# Altium PCB E21-015 PS Update.PcbDoc
Units mm, origin at the board's own origin, x right, y up, seen from the top; angles counter-clockwise.
Board outline 119.9 x 74.8 mm, 2 copper layers (Top Layer, Bottom Layer); 63 components, 27 nets, 168 pads, 149 vias.
Unrouted connection lines stored in the file: 4.
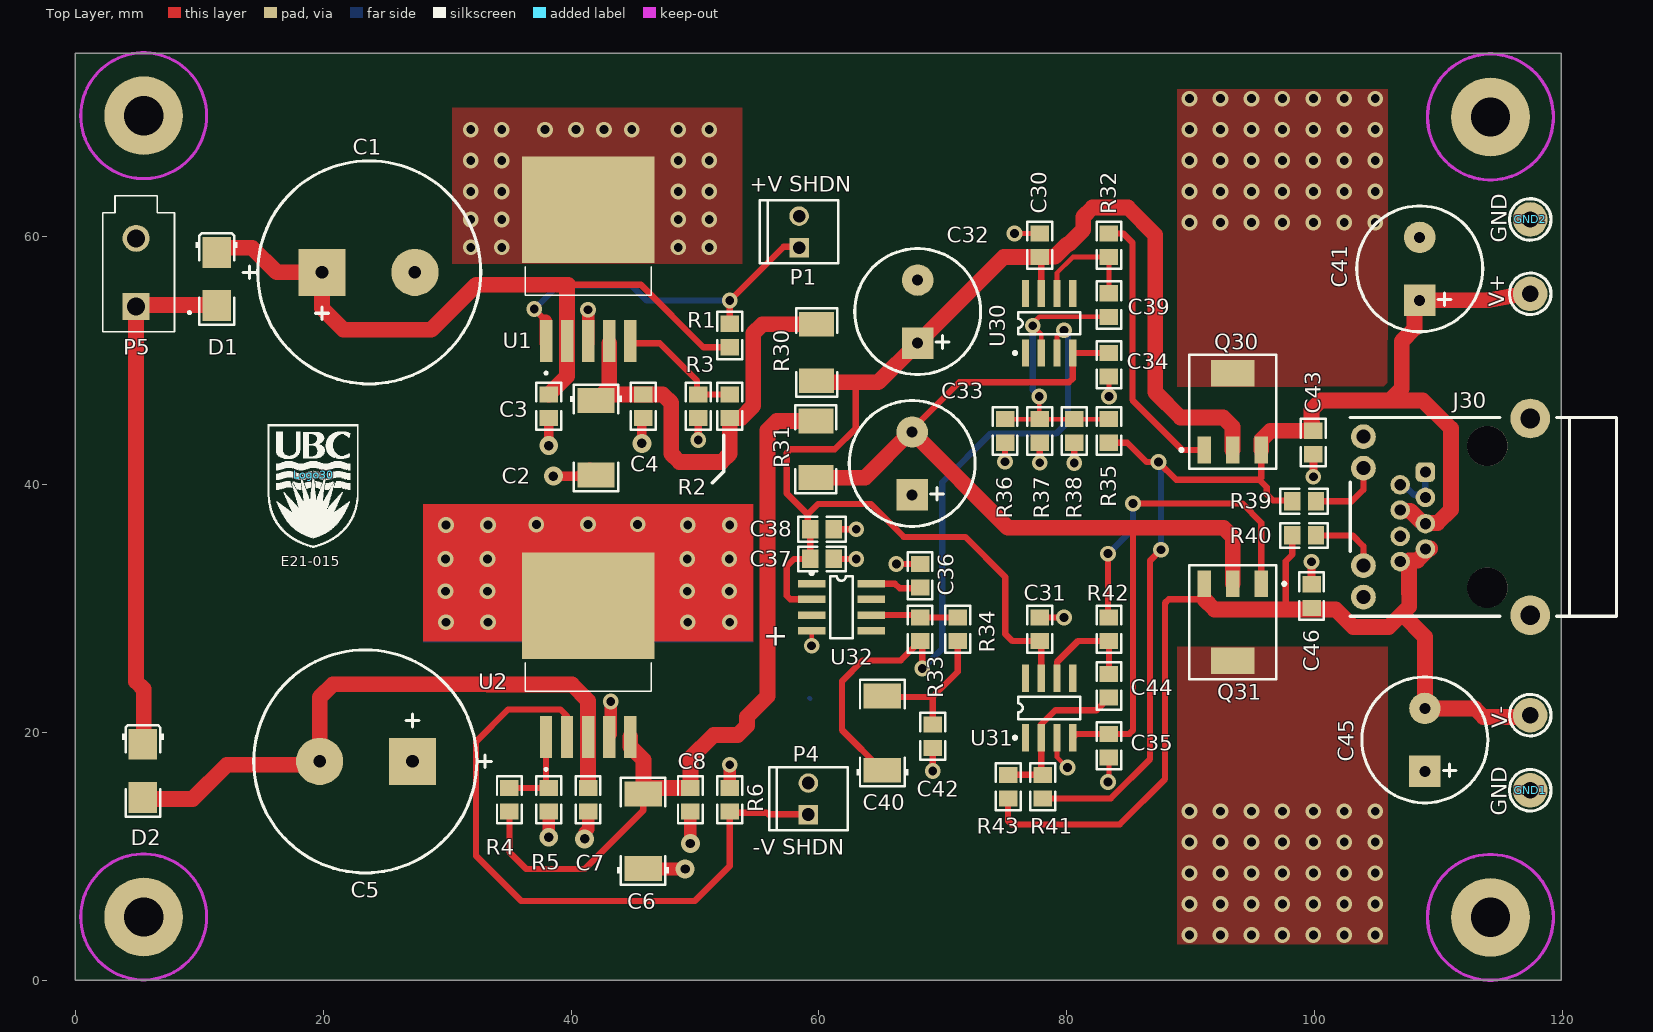
[diagram p0: Top Layer view]
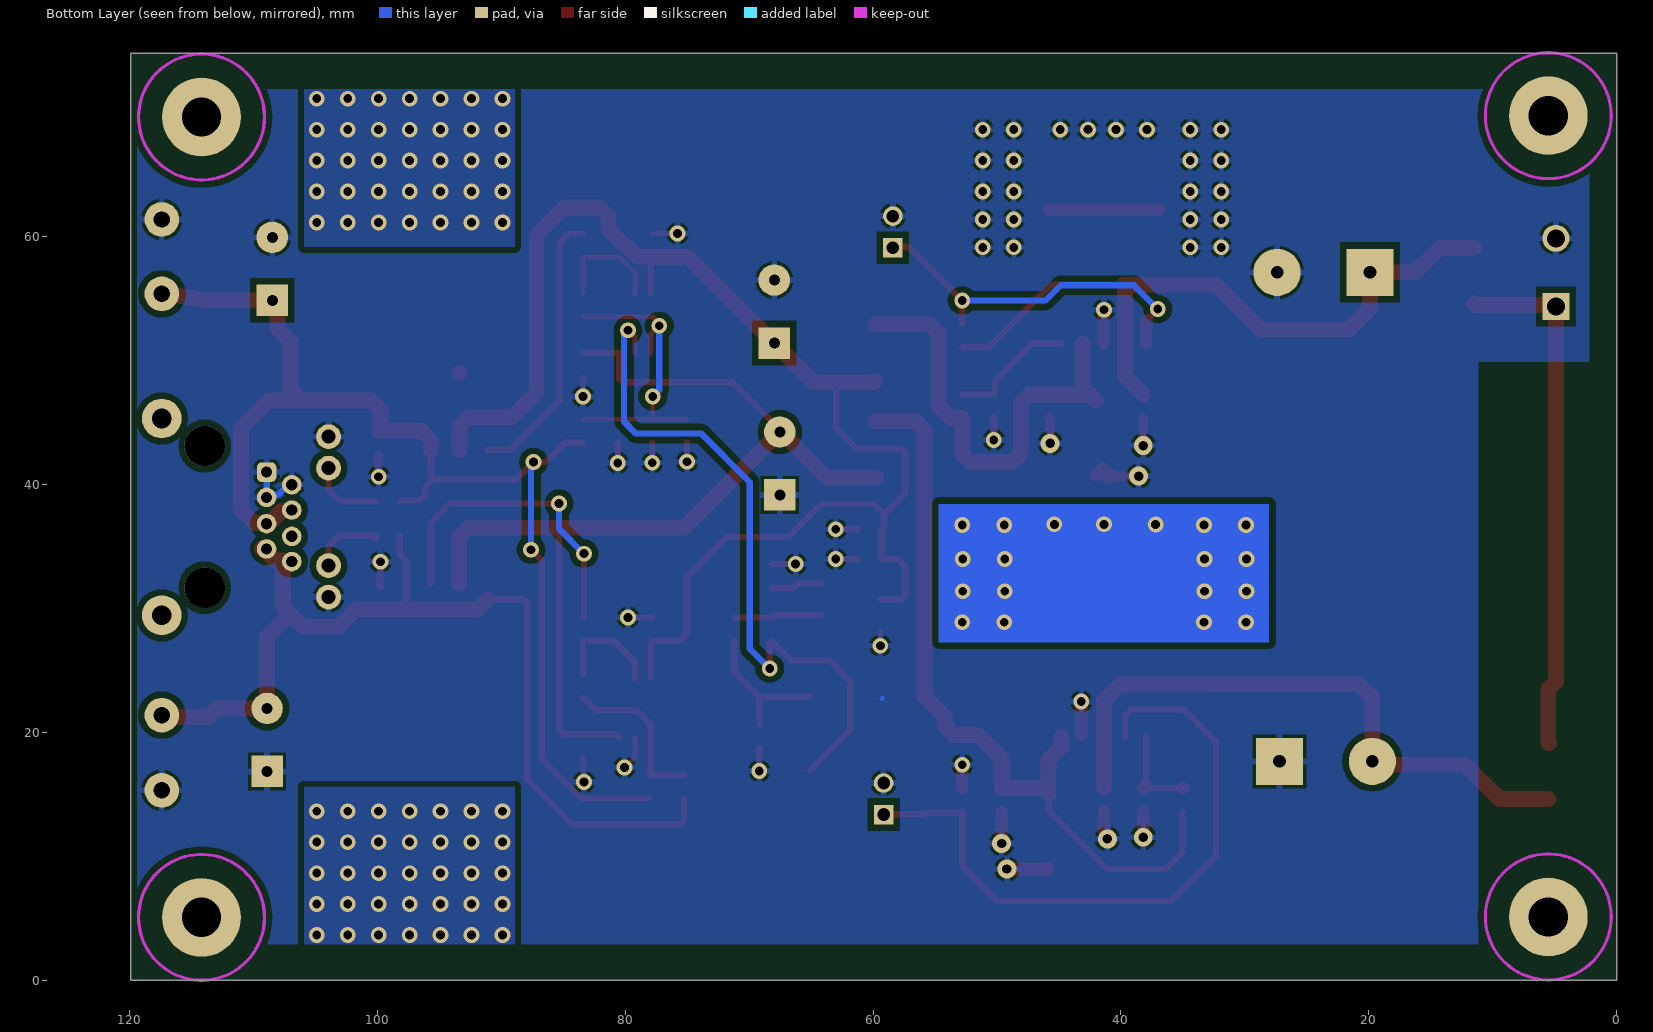
[diagram p1: Bottom Layer view, seen from below]
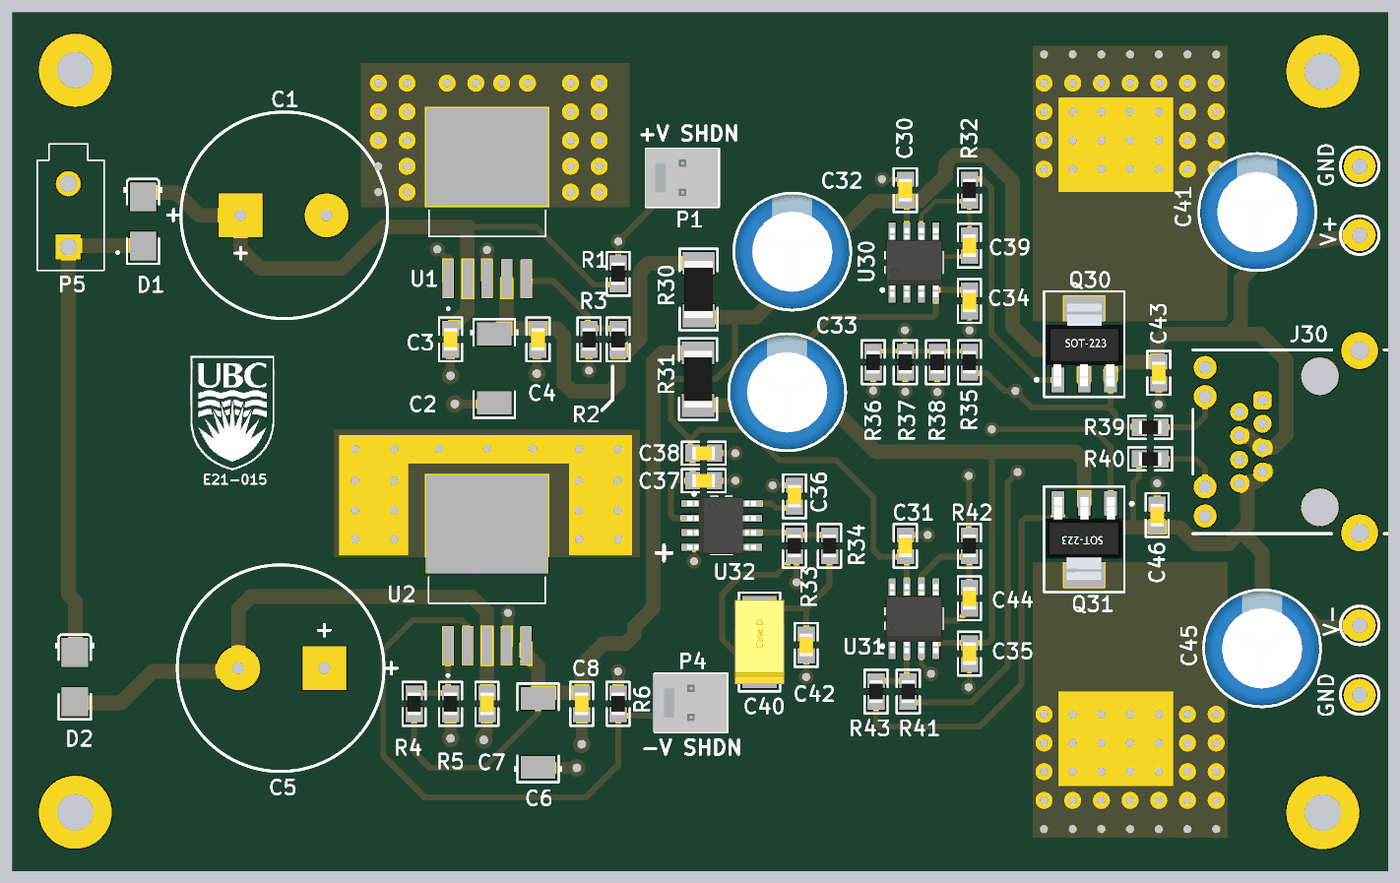
[diagram p2: 3D render of the assembled board from above, using the file's embedded part models]

## Layer stack, top to bottom
Top Solder: solder mask 0.0102, Solder Resist, Dk 3.5
Top Layer: signal copper 0.0356
Dielectric 1: dielectric 0.32, FR-4, Dk 4.8
Bottom Layer: signal copper 0.0356
Bottom Solder: solder mask 0.0102, Solder Resist, Dk 3.5

## Board outline
0,0 0,74.8 119.9,74.8 119.9,0

## Design rules (kind name [scope] priority, off if disabled: settings)
AcuteAngle [All] p1: minimum=3.00000000000000E+0001 checktracksonly=FALSE
Clearance Polygon_Pour [InPolygon] p1: gap=0.508 ignorepadtopadclearanceinfootprint=FALSE except(0: Arc-Hole Track-Hole SMDPad-Hole THPad-Hole Via-Hole Fill-Hole Poly-Hole Region-Hole Text-Hole)
Clearance [All] p2: gap=0.203 ignorepadtopadclearanceinfootprint=FALSE except(0: Arc-Hole Track-Hole SMDPad-Hole THPad-Hole Via-Hole Fill-Hole Poly-Hole Region-Hole Text-Hole)
HoleSize [All] p1: absolutevalues=TRUE maxlimit=6.35 minlimit=0.508 maxpercent=80.000 minpercent=20.000
MinimumAnnularRing [All] p1: minimumring=0.254
MinimumSolderMaskSliver [All] p1: minsoldermaskwidth=0.025
MinimumSolderMaskSliver SilkscreenOverComponentPads [All] p2: minsoldermaskwidth=0.025
PolygonConnect PolygonConnect_9 [All vs IsNamedPolygon('+16V_L01_P003')] p1: connectstyle=Direct reliefconductorwidth=0.254 reliefentries=4 polygonreliefangle="90 Angle" airgapwidth=0.254
PolygonConnect PolygonConnect_8 [All vs IsNamedPolygon('-16V_L01_P004')] p2: connectstyle=Direct reliefconductorwidth=0.254 reliefentries=4 polygonreliefangle="90 Angle" airgapwidth=0.254
PolygonConnect PolygonConnect_7 [All vs IsNamedPolygon('Bottom_GND')] p3: connectstyle=Relief reliefconductorwidth=0.508 reliefentries=4 polygonreliefangle="90 Angle" airgapwidth=0.254
PolygonConnect PolygonConnect_6 [All vs IsNamedPolygon('Bottom_GND')] p4: thpad.connectstyle=Relief thpad.reliefconductorwidth=0.508 thpad.reliefentries=4 thpad.polygonreliefangle="90 Angle" thpad.airgapwidth=0.254 smdpad.connectstyle=Relief smdpad.reliefconductorwidth=0.254 smdpad.reliefentries=4 smdpad.polygonreliefangle="90 Angle" smdpad.airgapwidth=0.254 via.connectstyle=Relief via.reliefconductorwidth=0.254 via.reliefentries=4 via.polygonreliefangle="90 Angle" via.airgapwidth=0.254
PolygonConnect PolygonConnect_5 [All vs IsNamedPolygon('+16V_L02_P006')] p5: connectstyle=Direct reliefconductorwidth=0.254 reliefentries=4 polygonreliefangle="90 Angle" airgapwidth=0.254
PolygonConnect PolygonConnect_4 [All vs IsNamedPolygon('-16V_L02_P002')] p6: connectstyle=Direct reliefconductorwidth=0.254 reliefentries=4 polygonreliefangle="90 Angle" airgapwidth=0.254
PolygonConnect PolygonConnect_3 [All vs IsNamedPolygon('GND_L01_P005')] p7: connectstyle=Direct reliefconductorwidth=0.254 reliefentries=4 polygonreliefangle="90 Angle" airgapwidth=0.254
PolygonConnect PolygonConnect_2 [All vs IsNamedPolygon('-16V_L01_P004')] p8: thpad.connectstyle=Direct thpad.reliefconductorwidth=0.254 thpad.reliefentries=4 thpad.polygonreliefangle="90 Angle" thpad.airgapwidth=0.254 smdpad.connectstyle=Direct smdpad.reliefconductorwidth=0.254 smdpad.reliefentries=4 smdpad.polygonreliefangle="90 Angle" smdpad.airgapwidth=0.254 via.connectstyle=Relief via.reliefconductorwidth=0.254 via.reliefentries=4 via.polygonreliefangle="90 Angle" via.airgapwidth=0.254
PolygonConnect PolygonConnect_1 [All vs IsNamedPolygon('+16V_L01_P003')] p9: thpad.connectstyle=Direct thpad.reliefconductorwidth=0.254 thpad.reliefentries=4 thpad.polygonreliefangle="90 Angle" thpad.airgapwidth=0.254 smdpad.connectstyle=Direct smdpad.reliefconductorwidth=0.254 smdpad.reliefentries=4 smdpad.polygonreliefangle="90 Angle" smdpad.airgapwidth=0.254 via.connectstyle=Relief via.reliefconductorwidth=0.254 via.reliefentries=4 via.polygonreliefangle="90 Angle" via.airgapwidth=0.254
PolygonConnect PolygonViaConnect [(InNet('GND') AND IsVia)] p10: connectstyle=Direct reliefconductorwidth=0.305 reliefentries=4 polygonreliefangle="45 Angle" airgapwidth=0.254
PolygonConnect [All] p11: connectstyle=Relief reliefconductorwidth=0.381 reliefentries=4 polygonreliefangle="45 Angle" airgapwidth=0.254
RoomDefinition "E21-015 PS Update" [InComponentClass('E21-015 PS Update')] p1: confinementstyle=ConfineIn formatcopy=TRUE lockcomponents=FALSE outline -25.5,-25.5 382.907,-25.5 382.907,213.539 -25.5,213.539
RoutingVias [All] p1: holewidth=0.711 width=1.27 viastyle="Through Hole" minholewidth=0.711 minwidth=1.27 maxholewidth=0.711 maxwidth=1.27
SilkToSilkClearance [All] p1: silktosilkclearance=0.051
SilkToSolderMaskClearance [IsPad] p1: minsilkscreentomaskgap=0.051 clearancetoexposedcopper=TRUE
SolderMaskExpansion [All] p1: expansion=0.102 istentingtop=FALSE
Width [All] p1: maxlimit=2.54 minlimit=0.203 preferedwidth=0.635 minimp=50.000000 maximp=50.000000 favimp=50.000000
26 further rules are at their usual default settings.

## Components (designator, comment, footprint, x,y, rotation, side; value= is the part's Value field where it differs from the comment)
C1 "Cap Elec 3300u 35V LESR" C-RAD7.5mm-18mm 19.9,57.131 r180 top value=3300uF
C2 "Cap Tant 10uF 35V D-Size" CC7343 42.007,43.78 r270 top value=10u
C3 "Cap Misc" C2012-0805 38.197,46.32 r90 top value=1u
C4 "Cap Misc" C2012-0805 45.817,46.32 r90 top value=u1
C5 "Cap Elec 3300u 35V LESR" C-RAD7.5mm-18mm 27.204,17.669 r0 top value=3300uF
C6 "Cap Tant 10uF 35V D-Size" CC7343 45.817,12.03 r90 top value=10u
C7 "Cap Misc" C2012-0805 41.372,14.57 r90 top value=1u
C8 "Cap Misc" C2012-0805 49.627,14.57 r90 top value=u1
C30 "Cap Misc" C2012-0805 77.815,59.318 r270 top value=u1
C31 "Cap Misc" C2012-0805 77.815,28.33 r270 top value=u1
C32 "Cap Elec 220u 35V" C-RAD400mil 67.97,53.969 r270 top value=220u
C33 "Cap Elec 220u 35V" C-RAD400mil 67.526,41.708 r270 top value=220u
C34 "Cap Misc" C2012-0805 83.403,49.666 r90 top value=u1
C35 "Cap Misc" C2012-0805 83.403,18.932 r90 top value=u1
C36 "Cap Misc" C2012-0805 68.163,32.648 r270 top value=u1
C37 "Cap Misc" C2012-0805 60.248,34.006 r180 top value=1u
C38 "Cap Misc" C2012-0805 60.248,36.4 r180 top value=u1
C39 "Cap Misc" C2012-0805 83.403,54.492 r90 top value=u1
C40 "Cap Tant 100uF 10V" CC7343 65.115,19.948 r90 top value=100u
C41 "Cap Elec 220u 35V" C-RAD400mil 108.484,57.413 r270 top value=220u
C42 "Cap Misc" C2012-0805 69.179,19.694 r90 top value=1u
C43 "Cap Misc" C2012-0805 99.9,43.4 r90 top value=1u
C44 "Cap Misc" C2012-0805 83.403,23.758 r90 top value=u1
C45 "Cap Elec 220u 35V" C-RAD400mil 108.9,19.4 r270 top value=220u
C46 "Cap Misc" C2012-0805 99.757,31.008 r270 top value=1u
D1 "1N5819" DO-214AA 11.4,56.6 r90 top
D2 "1N5819" DO-214AA 5.45,16.9 r90 top
GND1 "Check Point" PAD-110-52 117.4,15.336 r90 top
GND2 "Check Point" PAD-110-52 117.4,61.4 r0 top
J30 "RJ45_RJE58_Amphenol" RJ45_RJE51_LEDs 117.4,37.4 r90 top
Logo30 "Use UBC Logo" "UBC Logo" 19.231,40.78 r0 top
P1 "HEADER 1X2 L" HDR1X2_LOCKING 58.4,60.4 r90 top
P4 "HEADER 1X2 L" HDR1X2_LOCKING 59.15,14.65 r90 top
P5 "0039296028" MOLEX_0039296028 4.896,57.131 r180 top
Q30 "ZX5T853G" SOT-223 93.4,45.9 r0 top
Q31 "ZX5T951G" SOT-223 93.4,28.9 r180 top
R1 "Res-0805" R0805 52.802,52.035 r270 top value=10k
R2 "Res-0805" R0805 52.802,46.32 r270 top value=13k
R3 "Res-0805" R0805 50.262,46.32 r90 top value=1k
R4 "Res-0805" R0805 35.022,14.57 r270 top value=13k
R5 "Res-0805" R0805 38.197,14.57 r90 top value=1k
R6 "Res-0805" R0805 52.802,14.57 r90 top value=10k
R30 "Res-2010" R2010 59.81,50.667 r270 top value=1R
R31 "Res-2010" R2010 59.76,42.852 r270 top value=1R
R32 "Res-0805" R0805 83.403,59.318 r90 top value=4r7
R33 "Res-0805" R0805 68.163,28.33 r270 top value=1k
R34 "Res-0805" R0805 71.211,28.33 r270 top value=100k
R35 "Res-0805" R0805 83.403,44.332 r270 top value=10k
R36 "Res-0805" R0805 75.021,44.332 r90 top value=20k
R37 "Res-0805" R0805 77.815,44.332 r90 top value=DNP
R38 "Res-0805" R0805 80.609,44.332 r90 top value=DNP
R39 "Res-0805" R0805 99.15,38.65 r180 top value=1k5
R40 "Res-0805" R0805 99.15,35.9 r180 top value=1k5
R41 "Res-0805" R0805 78.069,15.63 r270 top value=15k
R42 "Res-0805" R0805 83.403,28.33 r270 top value=4r7
R43 "Res-0805" R0805 75.275,15.63 r90 top value=15k
U1 "TL1963A" TO-263-5 41.387,62.195 r90 top
U2 "LM2991" TO-263-5 41.372,30.229 r90 top
U30 "LME49990" SO-G8 78.577,53.019 r90 top
U31 "LME49990" SO-G8 78.577,21.98 r90 top
U32 "REF102" SO-G8 61.813,30.108 r0 top
V+ "Check Point" PAD-110-52 117.4,55.4 r180 top
V- "Check Point" PAD-110-52 117.4,21.4 r0 top

## Footprints (in the part's own frame and the unit in brackets; to place one, negate y for a bottom-side part, rotate by r counter-clockwise, add the part's x,y. Pads: shape width x height; smd on the part's side, far side on the other; paste and mask are expansions set on the pad)
C2012-0805 [mm]
  rect 1.3x1.5 smd: 1(-0.95,0) 2(0.95,0)
  silkscreen extent -1.91,-1 1.91,1, body extent -1,-0.6 1,0.6, height 0.7
C-RAD7.5mm-18mm [mil]
  rect 150x150 hole 40: 1(0,0)
  round 150 hole 40: 2(-295.28,0)
  silkscreen extent -504,-354 250,354
C-RAD400mil [mil]
  rect 100x100 hole 35: 1(100,0)
  round 100 hole 35: 2(-100,0)
  silkscreen extent -200,-200 200,200, body extent -197,-197 197,197, height 630
CC7343 [mm]
  rect 2x3 smd: 1(-3,0) 2(3,0)
  silkscreen extent -4.3,-2.1 4.3,2.11
DO-214AA [mm]
  rect 2.5x2.3 smd: 1(-2.15,0) 2(2.15,0)
  silkscreen extent -3.7,-1.7 3.7,1.7
HDR1X2_LOCKING [mil]
  rect 62x62 hole 40: 1(-50,0)
  round 62 hole 40: 2(50,0)
  silkscreen extent -100,-125 100,125, body extent -100,-122 100,128, height 420
MOLEX_0039296028 [mm]
  rect 2.175x2.175 hole 1.45: 1(0,2.75)
  round 2.175 hole 1.45: 2(0,-2.75)
  silkscreen extent -4.4,-6.2 2.7,4.8
PAD-110-52 [mil] "Pad 100mil Diameter 52mil Hole"
  round 110 hole 52: 1(0,0)
  silkscreen extent -66,-66 66,66
R0805 [mm]
  rect 1.3x1.5 smd: 1(-0.95,0) 2(0.95,0)
  silkscreen extent -1.91,-1 1.91,1, body extent -1,-0.6 1,0.6, height 0.5
R2010 [mm]
  rect 2x2.8 smd: 1(-2.286,0) 2(2.286,0)
  silkscreen extent -3.56,-1.65 3.56,1.65, body extent -2.5,-1.25 2.5,1.25, height 0.65
RJ45_RJE51_LEDs [mm] "Shielded RJ45 Socket Conenctor with LEDs"
  rrect50% 1.575x1.575 hole 0.9: 1(3.61,8.46)
  round 1.575 hole 0.9: 2(2.59,10.49) 3(1.57,8.46) 4(0.55,10.49) 5(-0.55,8.46) 6(-1.57,10.49) 7(-2.59,8.46) 8(-3.61,10.49)
  round 3.25 hole 3.25: 13(5.715,3.46) 14(-5.715,3.46)
  round 3.2 hole 1.6: 15(7.94,0) 16(-7.94,0)
  round 2 hole 1.12: A1(6.471,13.46) A2(3.931,13.46) A3(-3.931,13.46) A4(-6.471,13.46)
  silkscreen extent -8.02,-6.97 8.02,14.52
SO-G8 [mm] "SOIC, 8-Leads, Body 5.0x4.0mm (max), Pitch 1.27mm, IPC Medium Density"
  rect 2.2x0.6 smd: 1(-2.4,1.905) 2(-2.4,0.635) 3(-2.4,-0.635) 4(-2.4,-1.905) 5(2.4,-1.905) 6(2.4,-0.635) 7(2.4,0.635) 8(2.4,1.905)
  silkscreen extent -2.52,-2.5 0.9,2.88, body extent -3.01,-2.5 3.01,2.5, height 1.75
SOT-223 [mm]
  rect 1.1x2.15 smd: 1(-2.3,-3.1) 2(0,-3.1) 3(2.3,-3.1)
  rect 3.5x2.15 smd: 4(0,3.1)
  silkscreen extent -4.27,-4.6 3.5,4.6, body extent -3.33,-3.67 3.37,3.53, height 1.95
TO-263-5 [mm]
  rect 3.4x1 smd paste-3 mask+0: 1(-10.6,3.4) 2(-10.6,1.7) 3(-10.6,0) 4(-10.6,-1.7) 5(-10.6,-3.4)
  rect 8.6x10.7 smd paste-6 mask+0: 6(0,0)
  silkscreen extent -13.3,-5.08 -4.62,5.08
"UBC Logo" [mm] "UBC Silkscreen Logo - 288mil x 392mil"
  silkscreen extent -3.71,-5.87 3.61,4.09

## Part data
C1 C5: library part "Cap Elec 1000u 35V LESR", "3300u 35V Low ESR Radial Lead", Manufacturer=Nichicon, Part Number=EKYB350ELL332MM25S, Voltage=35V, Class=Passive, Price=$, Published=2003/7/14, Publisher=UBC, SubClass=Capacitor, Type=TH
C2 C6: Manufacturer=Kemet, Part Number=T491D106035DAT, Voltage=35V, Class=Passive, Price=$0.20, Published=2006-10-30, Publisher=UBC, SubClass=Capacitor, Type=SMD
C3 C4 C7 C8 C30 C31 C34 C35 C36 C37 C38 C39 C42 C43 C44 C46: "Misc Capacitor", Manufacturer="Generic Components", Class=Passive, Price=$, Published=08/06/2000, Publisher="Altium Hobart Technology Centre", SubClass=Capacitor, Type=SMD
C32 C33 C41 C45: "220u 35V Low ESR Radial Lead", Manufacturer=Mallory, Part Number=SK221M025ST, Voltage=35V, Class=Passive, Price=$1.17, Published=2003/7/14, Publisher=UBC, Scuba2 No.="000645 CAP", SubClass=Capacitor, Type=TH
C40: "Cap Tant Poly 100uF 10V D-Size Low ESR", Manufacturer=Kemet, Part Number=T520D107M010ASE018, Voltage=10V, Class=Passive, Price=$0.05, Published=2003/8/21, Publisher=UBC, Scuba2 No.="000523 CAP", SubClass=Capacitor, Type=SMD
D1 D2: "Schottky Barrier Diode 40V 1A", Manufacturer=Motorola, Class=Discrete, Part Number=1N5819, Published=2004/05/27, Publisher=UBC, SubClass="Diode - Switching", Type=TH
GND1 GND2 V+ V-: "PCB Check Point", Manufacturer=UBC, Part Number=20-313143A, Class=Passive, Price=$, Published=03/17/2003, Publisher="R. Lam", Type=TH
J30: "RJ45 Socket RA PCB mount CAT6 w/ LED's", Manufacturer=Amphenol, Part Number=RJE58, Price=$, Published=2015/01/05, Publisher=UBC, Type=TH
Logo30: library part "Directive: Add UBC Logo to PCB", "UBC Logo"
P1 P4: "0.1\" Spacing 1x2 Locking Header", Manufacturer=AMP, Price=$, Published=3/25/2003, Publisher=UBC, Type=TH
P5: "Connector Header Through Hole 2 position", Package=None, Availability=Unavailable, MF=Molex, MP=0039296028, Price=None, SnapEDA_Link=https://www.snapeda.com/parts/0039296028/Molex/view-part/2751623/?ref=snap
Q30: "1000V NPN Medium Power Low Sat Transistor", Manufacturer="Diodes Inc.", Class=Discrete, Part Number=ZX5T853G, Price=$, Published=2016-01-05, Publisher=UBC, SubClass=Transistor, Type=SMT
Q31: "60V PNP Medium Power Low Sat Transistor", Manufacturer="Diodes Inc.", Class=Discrete, Part Number=ZX5T951G, Price=$, Published=2016-01-05, Publisher=UBC, SubClass=Transistor, Type=SMT
R1 R2 R3 R4 R5 R6 R30 R31 R32 R33 R34 R35 R36 R37 R38 R39 R40 R41 R42 R43: "Resistor", Manufacturer="Generic Components", Class=Passive, Price=$, Published=08/06/2000, Publisher="Altium Hobart Technology Centre", SubClass=Resistor, Type=SMD
U1: "LDO +V. Regulator ADJ  1.5A", Manufacturer=TI, Part Number=TL1963A, Price=$1.34, Type=SMD
U2: "LDO -V. Regulator ADJ  1.5A", Manufacturer=TI, Part Number=LM2991, Price=$1.34, Type=SMD
U30 U31: "Ultra low distortion and noise Op Amp", Manufacturer=TI, Part Number=OPA1611, Class=Amplifier, Price=$, Published=2015-11-26, Publisher=UBC, SubClass="Operational Amplifier", Type=SMD
U32: "10V Precision Voltage Reference", Manufacturer="Texas Instruments", Class=Amplifier, Part Number=REF102, Published=26/11/2015, Publisher="Altium Hobart Technology Centre", Type=SMD

## Free pads (board coordinates)
  round 6.35 hole 3.175: ""(5.506,69.775) ""(5.506,5.115) ""(114.191,5.078) ""(114.191,69.668)

## Via types
v1: diameter 1.27, hole 0.711, Top Layer to Bottom Layer, 97 vias
v2: diameter 1.27, hole 0.711, Top Layer to Bottom Layer, tented both sides, 45 vias
v3: diameter 1.524, hole 0.762, Top Layer to Bottom Layer, tented both sides, 7 vias

## Nets (pads, with @x,y where several pads share a name; then routed paths per layer and width w, separated by ;. In a path a pad name is that pad's centre, name@x,y a point inside that pad or via, vN(x,y) a via of type N, cw(c..) or ccw(c..) an arc to the next point about the centre after c; other vN are vias at no path point)
+16V: C30.2 C31.2 C32.1 C37.2 C38.2 Q30.2 Q30.4 R30.2 U30.7 U31.7 U32.2 | length 115.3
  Top Layer w0.508: 59.09,37.597 59.938,38.446 64.171,38.446 66.838,35.779 71.812,35.779 75.047,32.544 75.047,27.949 75.616,27.38 C31.2 77.942,27.253 U31.7 ; U32.2 57.698,30.743 57.4,31.041 57.4,33.406 57.698,33.703 57.698,33.708 57.995,34.006 C37.2 C38.2 59.096,36.602 59.096,37.591 57.4,39.287 57.4,42.555 57.698,42.852 61.286,42.852 62.965,44.531 62.965,48.256 ; C30.2 77.942,58.241 U30.7
  Top Layer w1.27: R30.2 59.935,48.256 62.965,48.256 64.797,48.256 C32.1 74.91,58.368 C30.2 77.83,58.383 79.032,58.383 80.046,59.397 80.156,59.397 81.327,60.569 81.327,61.616 82.071,62.36 84.941,62.36 87.15,60.151 87.15,47.452 89.184,45.418 92.633,45.418 93.377,44.674 93.377,42.777 Q30.2 ; Q30.4@93.377,49.023 Q30.4
  other v1: 89.9,61.15 92.4,61.15 94.9,61.15 97.4,61.15 99.9,61.15 102.4,61.15 104.9,61.15 89.9,63.65 92.4,63.65 94.9,63.65 97.4,63.65 99.9,63.65 102.4,63.65 104.9,63.65 89.9,66.15 92.4,66.15 94.9,66.15 97.4,66.15 99.9,66.15 102.4,66.15 104.9,66.15 89.9,68.65 92.4,68.65 94.9,68.65 97.4,68.65 99.9,68.65 102.4,68.65 104.9,68.65
  other v2: 89.9,71.15 92.4,71.15 94.9,71.15 97.4,71.15 99.9,71.15 102.4,71.15 104.9,71.15
+Vreg: C2.1 C4.2 R2.2 R30.1 U1.4 | length 36.8
  Top Layer w1.27: C2.1 C2.1@42.497,47.27 ; U1.4@43.074,51.4 43.074,47.846 C2.1@42.497,47.27 ; R30.1 55.451,52.953 54.707,52.209 54.707,46.368 53.723,45.385 52.817,45.385 R2.2 52.802,42.493 52.132,41.824 48.747,41.824 48.078,42.493 48.078,46.599 47.407,47.27 C4.2 43.074,47.27 C2.1@42.497,47.27
-16V: C33.2 C34.2 C35.2 Q31.2 Q31.4 R31.2 U30.4 U31.4 | length 84
  Top Layer w0.508: C33.2@67.173,44.104 71.325,48.256 80.175,48.256 80.472,48.553 80.472,50.609 U30.4 ; U31.4 80.784,19.882 85.05,19.882 85.347,20.18 85.347,36.523 ; U30.4@80.53,50.616 C34.2
  Top Layer w1.27: R31.2 63.71,40.566 67.392,44.248 C33.2 67.526,44.243 75.246,36.523 85.347,36.523 92.656,36.523 93.4,35.779 Q31.2
  other v1: 89.9,6.15 92.4,6.15 94.9,6.15 97.4,6.15 99.9,6.15 102.4,6.15 104.9,6.15 89.9,8.65 92.4,8.65 94.9,8.65 97.4,8.65 99.9,8.65 102.4,8.65 104.9,8.65 89.9,11.15 92.4,11.15 94.9,11.15 97.4,11.15 99.9,11.15 102.4,11.15 104.9,11.15 89.9,13.65 92.4,13.65 94.9,13.65 97.4,13.65 99.9,13.65 102.4,13.65 104.9,13.65
  other v2: 89.9,3.65 92.4,3.65 94.9,3.65 97.4,3.65 99.9,3.65 102.4,3.65 104.9,3.65
-Vreg: C6.2 C8.2 R4.2 R31.1 U2.5 | length 63.8
  Top Layer w0.508: R4.2 35.022,10.353 36.394,8.982 41.093,8.982 45.817,13.706 C6.2
  Top Layer w1.27: U2.5@44.776,19.65 44.776,18.862 45.842,17.795 45.842,15.52 C6.2@45.842,15.055 ; C6.2 C6.2@45.842,15.055 ; R31.1 56.594,45.138 55.85,44.394 55.85,22.925 54.199,21.274 54.199,20.546 53.455,19.802 51.507,19.802 49.627,17.922 C8.2 46.307,15.52 C6.2@45.842,15.055
GND: C1.2 C2.2 C3.1 C4.1 C5.1 C6.1 C7.1 C8.1 C30.1 C31.1 C32.2 C33.1 C34.1 C35.1 C36.1 C37.1 C38.1 C41.2 C42.1 C43.1 C45.1 C46.1 GND1.1 GND2.1 J30.1 J30.2 J30.3 J30.A1 J30.A4 P1.2 P4.2 P5.2 R3.1 R5.1 R6.2 R36.1 R37.1 R38.1 U1.3 U1.6 U2.4 U31.3 U32.4 | length 72.7
  Top Layer w0.381: v2(59.413,26.997) U32.4 ; v2(75.775,60.268) C30.1 ; U31.3 79.212,18.018 v2(80.051,17.18) ; v2(83.327,16.011) 83.403,16.088 C35.1 ; v2(83.403,47.111) C34.1
  Top Layer w0.508: C37.1 v2(63.007,34.006) ; C38.1@61.248,36.4 v2(63.007,36.4) ; v2(66.248,33.598) C36.1 ; v2(69.179,16.9) C42.1 ; v2(75.021,41.843) R36.1 ; C31.1 v2(79.771,29.28) ; v2(77.815,41.767) R37.1 ; v2(80.609,41.742) R38.1
  Top Layer w0.635: C4.1 C4.1@45.832,45.355 ; v2(50.262,43.602) R3.1 ; C46.1@99.756,31.826 v2(99.756,33.782) ; v2(99.9,40.643) C43.1
  Top Layer w0.762: v3(38.197,43.15) C3.1 ; v3(38.575,40.691) C2.2@40.947,40.691 ; v3(45.712,43.332) 45.712,45.235 C4.1@45.832,45.355
  Top Layer w1.016: U1.6@36.912,62.18 U1.6@41.372,62.18 ; v3(38.197,11.547) R5.1 ; C2.2@40.982,40.725 41.522,41.265 C2.2 ; v3(41.093,11.42) 41.093,11.928 41.372,12.207 C7.1 ; U1.3@41.372,51.4 v2(41.372,54.117) ; U2.4@43.2,19.876 v2(43.2,22.493) ; C6.1 45.865,8.982 v3(49.2,8.982) ; U1.6@45.832,62.18 U1.6@45.167,62.18 ; v3(49.627,11.04) C8.1 ; R6.2 v2(52.802,17.389) ; U1.6@41.372,62.18 U1.6@45.167,62.18 ; U1.6@41.372,62.18 U1.6 45.182,62.195 U1.6@45.167,62.18
  Top Layer w1.27: C2.2@40.947,40.691 C2.2@40.982,40.725
  Bottom Layer w0.381: 59.248,22.765 59.299,22.714 ; v2@59.4,26.984 v2(59.413,26.997) ; v2(69.179,16.9) v2@69.281,16.799 ; v2(75.021,41.843) v2@75.072,41.792 ; v2(75.775,60.268) 75.9,60.268 v2@75.91,60.258
  Bottom Layer w0.508: J30.2 107.199,39.99 108.015,39.174 108.736,39.174 J30.3 J30.1
  other v1: 34.4,59.15 48.65,59.15 51.15,59.15 34.4,61.4 48.65,61.4 51.15,61.4 31.9,63.65 34.4,63.65 48.65,63.65 51.15,63.65 31.9,66.15 34.4,66.15 48.65,66.15 51.15,66.15 31.9,68.65 34.4,68.65 37.9,68.65 40.4,68.65 42.65,68.65 44.9,68.65 48.65,68.65 51.15,68.65
  other v2: 31.9,59.15 31.9,61.4
NetC1_1: C1.1 C3.2 D1.2 R1.2 U1.2 | length 58.8
  Top Layer w0.508: 39.772,56.124 45.639,56.124 50.679,51.085 R1.2
  Top Layer w1.27: D1.2@11.5,59.127 14.258,59.127 16.254,57.131 C1.1 19.9,54.228 21.633,52.496 28.715,52.496 32.343,56.124 39.772,56.124 39.67,56.022 39.67,51.4 39.67,48.743 C3.2
NetC5_2: C5.2 C7.2 D2.1 U2.3 | length 50.4
  Top Layer w1.27: D2.1@5.506,14.642 9.468,14.642 12.226,17.4 19.628,17.4 19.726,17.498 19.726,22.848 20.778,23.9 33.261,23.9 33.295,23.866 40.077,23.866 41.372,22.571 41.372,19.65 C7.2
NetC36_2: C36.2 U32.8 | length 4.1
  Top Layer w0.508: U32.8 66.131,32.013 66.512,31.632 68.097,31.632 C36.2
NetC39_1: C39.1 R35.1 R36.2 R37.2 R38.2 U30.2 | length 25.6
  Top Layer w0.381: R36.2 R35.1 ; v2(77.78,47.111) 77.78,45.318 R37.2 ; U30.2@77.942,50.568 77.942,52.13 v2(77.257,52.816) 77.257,53.019 77.78,53.542 C39.1
  Bottom Layer w0.381: v2(77.78,47.111) 77.78,46.959 v2@77.942,46.796
  Bottom Layer w0.508: v2(77.257,52.816) 77.257,47.634 v2(77.78,47.111)
NetC39_2: C39.2 R32.1 U30.6 | length 9.4
  Top Layer w0.381: U30.6@79.212,55.368 79.212,57.109 80.472,58.368 R32.1 C39.2
NetC40_1: C40.1 R33.2 U30.3 | length 56
  Top Layer w0.381: U30.3@79.212,50.568 79.212,51.952 79.72,52.46 v2(79.771,52.46)
  Top Layer w0.508: C40.1 61.864,20.2 61.864,24.139 63.541,25.816 66.599,25.816 R33.2 68.341,27.203 v2(68.341,25.155)
  Bottom Layer w0.508: v2(68.341,25.155) 69.941,26.756 69.941,40.192 73.878,44.129 79.136,44.129 80.101,45.094 80.101,52.13 v2(79.771,52.46)
NetC40_2: C40.2 C42.2 R34.2 | length 11.7
  Top Layer w0.508: C40.2 65.194,22.869 69.179,22.869 ; C42.2 69.179,22.869 ; R34.2 71.211,24.901 69.179,22.869
NetC44_1: C44.1 R41.1 R43.2 U31.2 | length 13.3
  Top Layer w0.508: R43.2 R41.1 77.942,16.707 U31.2 77.942,20.66 79.085,21.803 82.398,21.803 C44.1
NetC44_2: C44.2 R42.2 U31.6 | length 8.9
  Top Layer w0.508: U31.6 79.212,25.689 80.904,27.38 R42.2 C44.2
NetD1_1: D1.1 D2.2 P5.1 | length 42.2
  Top Layer w1.27: D2.2@5.45,19.15 5.506,19.206 5.506,23.5 4.896,24.11 P5.1 5.019,54.504 11.377,54.504 D1.1@11.5,54.627
NetJ30_A2: J30.A2 R39.1 | length 6
  Top Layer w0.508: R39.1 102.992,38.65 103.94,39.598 J30.A2
NetJ30_A3: J30.A3 R40.1 | length 5.8
  Top Layer w0.508: R40.1@100.08,35.598 R40.1@100.13,35.548 ; R40.1 103.083,35.9 103.94,35.043 J30.A3
NetP1_1: P1.1 R1.1 U1.1 | length 29.5
  Top Layer w0.508: v2(37.029,54.168) U1.1@37.968,53.228 ; R1.1 v2(52.802,54.854) 57.148,59.2 58.33,59.2 P1.1
  Top Layer w1.016: U1.1@37.968,51.4 U1.1@37.968,53.228
  Bottom Layer w0.508: v2(37.029,54.168) 38.959,56.099 44.852,56.099 46.096,54.854 v2(52.802,54.854)
NetP4_1: P4.1 R6.1 U2.2 | length 53.5
  Top Layer w0.508: U2.2@39.67,19.65 39.67,21.326 39.137,21.859 34.92,21.859 32.33,19.269 32.33,10.048 35.978,6.4 49.977,6.4 52.802,9.225 R6.1 52.888,13.534 55.766,13.534 55.9,13.4 59.13,13.4 P4.1
NetQ30_1: Q30.1 R32.2 | length 22.4
  Top Layer w0.508: R32.2 84.562,60.268 85.302,59.528 85.302,46.825 89.327,42.8 Q30.1
NetQ31_1: Q31.1 R42.1 | length 26
  Top Layer w0.508: v2(83.336,34.432) 83.336,29.348 R42.1 ; v2(85.347,38.484) 94.15,38.484 95.7,36.934 Q31.1
  Bottom Layer w0.508: v2(83.336,34.432) 85.347,36.443 v2(85.347,38.484)
NetR2_1: R2.1 R3.2 U1.5 | length 10.3
  Top Layer w0.508: U1.5@44.776,51.4 47.15,51.4 50.166,48.384 50.166,47.366 R3.2 R2.1
NetR4_1: R4.1 R5.2 U2.1 | length 7.4
  Top Layer w0.508: R4.1 R5.2 ; R5.2@37.968,15.748 U2.1@37.968,19.65
  Top Layer w1.016: R5.2@37.968,15.748 R5.2
NetR33_1: R33.1 R34.1 U32.6 | length 7.1
  Top Layer w0.508: U32.6 67.97,29.473 R33.1 R34.1
therm_pad: U2.6
  other v1: 29.9,28.9 33.295,28.9 49.407,28.9 52.802,28.9 29.866,31.4 33.261,31.4 49.373,31.4 52.768,31.4 29.866,34.006 33.261,34.006 49.373,34.006 52.768,34.006 29.9,36.749 33.295,36.749 49.407,36.749 52.802,36.749 37.197,36.787 41.372,36.795 45.372,36.795
VOUT+: C41.1 C43.2 J30.4 J30.5 Q30.3 R35.2 R39.2 R41.2 V+.1 | length 103.2
  Top Layer w0.508: R41.2 83.541,14.68 86.723,17.863 86.723,33.878 v2(87.599,34.754) ; R35.2 84.883,43.382 86.442,41.823 87.398,41.823 v2(87.4,41.822) 88.831,40.391 95.544,40.391 ; Q30.3 95.7,40.547 95.544,40.391 ; R39.2 98.134,38.716 96.658,38.716 96.15,39.224 96.15,39.786 95.544,40.391
  Top Layer w1.27: Q30.3 95.7,43.606 96.444,44.35 C43.2 ; C43.2@99.785,44.35 99.785,44.967 99.752,45 99.752,46.052 100.496,46.796 106.07,46.796 ; J30.4 106.968,37.892 107.719,37.892 108.609,37.002 108.705,37.002 108.858,36.85 J30.5 108.998,36.908 109.927,36.908 111,37.982 111,44.529 108.733,46.796 106.07,46.796 ; C41.1@108.4,54.873 113.93,54.873 114.039,54.892 117.331,55.469 V+.1 ; C41.1 108.058,54.448 108.058,52.605 107.035,51.581 107.035,47.761 106.07,46.796
  Bottom Layer w0.508: v2(87.4,41.822) 87.4,41.719 87.599,41.52 v2(87.599,34.754)
VOUT-: C45.2 C46.2 J30.7 J30.8 Q31.3 R40.2 R43.1 V-.1 | length 81.6
  Top Layer w0.508: R43.1 75.261,14.666 75.261,12.878 75.558,12.581 84.272,12.581 87.929,16.238 87.929,30.446 88.227,30.743 91.1,30.743 ; 97.675,29.93 97.675,33.83 98.2,34.355 R40.2
  Top Layer w1.27: 91.1,30.743 91.913,29.93 97.675,29.93 101.702,29.93 103.129,28.504 105.978,28.504 107.045,29.571 ; J30.7@109.34,34.85 109.258,34.85 108.296,33.888 107.618,33.888 107.56,33.83 107.618,33.772 107.618,31.25 107.645,31.223 107.645,30.171 107.045,29.571 ; V-.1 117.256,21.256 113.629,21.256 112.945,21.94 C45.2 108.9,27.716 107.045,29.571
  Bottom Layer w0.508: C45.2@108.574,21.614 C45.2
pads on no net: J30.6 J30.13 J30.14 J30.15 J30.16 U30.1 U30.5 U30.8 U31.1 U31.5 U31.8 U32.1 U32.3 U32.5 U32.7

## Polygon pours and split planes (outlines as drawn)
GND on Top Layer "GND_L01_P005" (solid, pour order 5): 53.802,70.4 53.802,57.823 30.4,57.823 30.4,70.4
-16V on Top Layer "-16V_L01_P004" (solid, pour order 4): 88.9,2.9 88.9,26.9 105.9,26.9 105.9,2.9
+16V on Top Layer "+16V_L01_P003" (solid, pour order 3): 88.9,47.9 88.9,71.9 105.9,71.9 105.9,47.9
GND on Bottom Layer "Bottom_GND" (solid, remove dead copper, pour order 7): 2.2,49.9 11.15,49.9 11.15,2.9 119.4,2.9 119.4,71.9 2.2,71.9
+16V on Bottom Layer "+16V_L02_P006" (solid, pour order 6): 88.9,59.195 88.9,71.9 105.9,71.9 105.9,59.195
-16V on Bottom Layer "-16V_L02_P002" (solid, pour order 2): 88.9,2.9 88.9,15.605 105.9,15.605 105.9,2.9

## Keep-outs
Keep-Out Layer:
  circle w0.254: c5.506,69.775 r5.08
  circle w0.254: c5.506,5.115 r5.08
  circle w0.254: c114.191,69.668 r5.08
  circle w0.254: c114.191,5.078 r5.08

## Other copper
Top Layer:
  rectangle net therm_pad: 28.037,27.358 54.707,38.446
Bottom Layer:
  rectangle net therm_pad: 28.037,27.27 54.707,38.446

## Silkscreen, mask and mechanical layers (free items; w line width, h text height)
Top Overlay:
  lines w0.305: 51.405,40.147 52.319,41.062 52.319,41.824 52.319,43.957
  text "+V SHDN" at 54.4,63.65 h1.27
  text "GND" at 115.488,59.504 h1.27 r90
  text "E21-015" at 16.564,33.4 h0.81
  text "+" at 55.494,27.016 h1.78
  text "GND" at 115.488,13.289 h1.27 r90
  text "-V SHDN" at 54.65,10.15 h1.27
Top Solder:
  region: 28.5,27.5 28.5,38 54,38 54,27.5 48.5,27.5 48.5,35.5 34.5,35.5 34.5,27.5
  region: 47.5,70
  region: 47.7,70.4
  region: 91.15,67.4 91.15,59.15 101.15,59.15 101.15,67.4
  region: 91.15,15.65 91.15,7.4 101.15,7.4 101.15,15.65
Mechanical 1:
  the board outline again, w0.254
Mechanical 15:
  lines w0.152: -0.1,2.9 122.4,2.9 ; -0.1,71.9 122.4,71.9
  lines w0.254: -0.1,67.4 122.4,67.4 ; 8.9,6.9 131.4,6.9 ; 18.357,-0.1 18.357,74.857 ; 122.8,-2.35 122.8,75.4

## Dimensions
0,0 to 119.9,0 on Mechanical 15
0,0 to 0,74.8 on Mechanical 15